# EAGLE board GPS_board_brd (EAGLE 8.6.0)
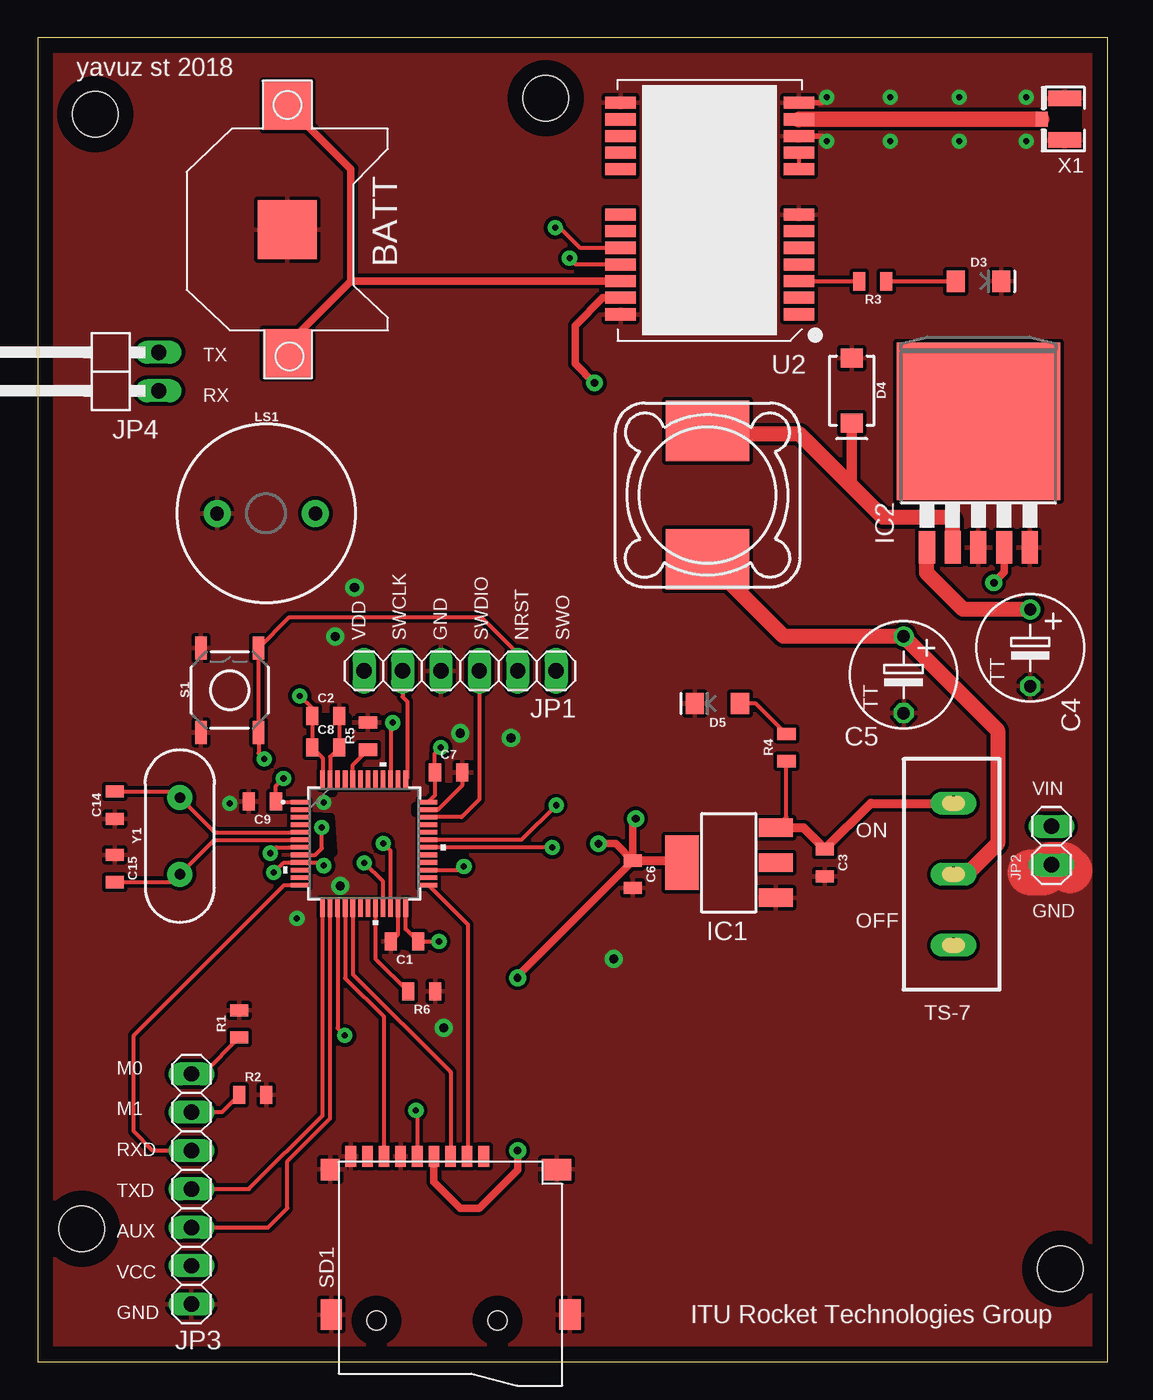
[diagram p0: board, top side]
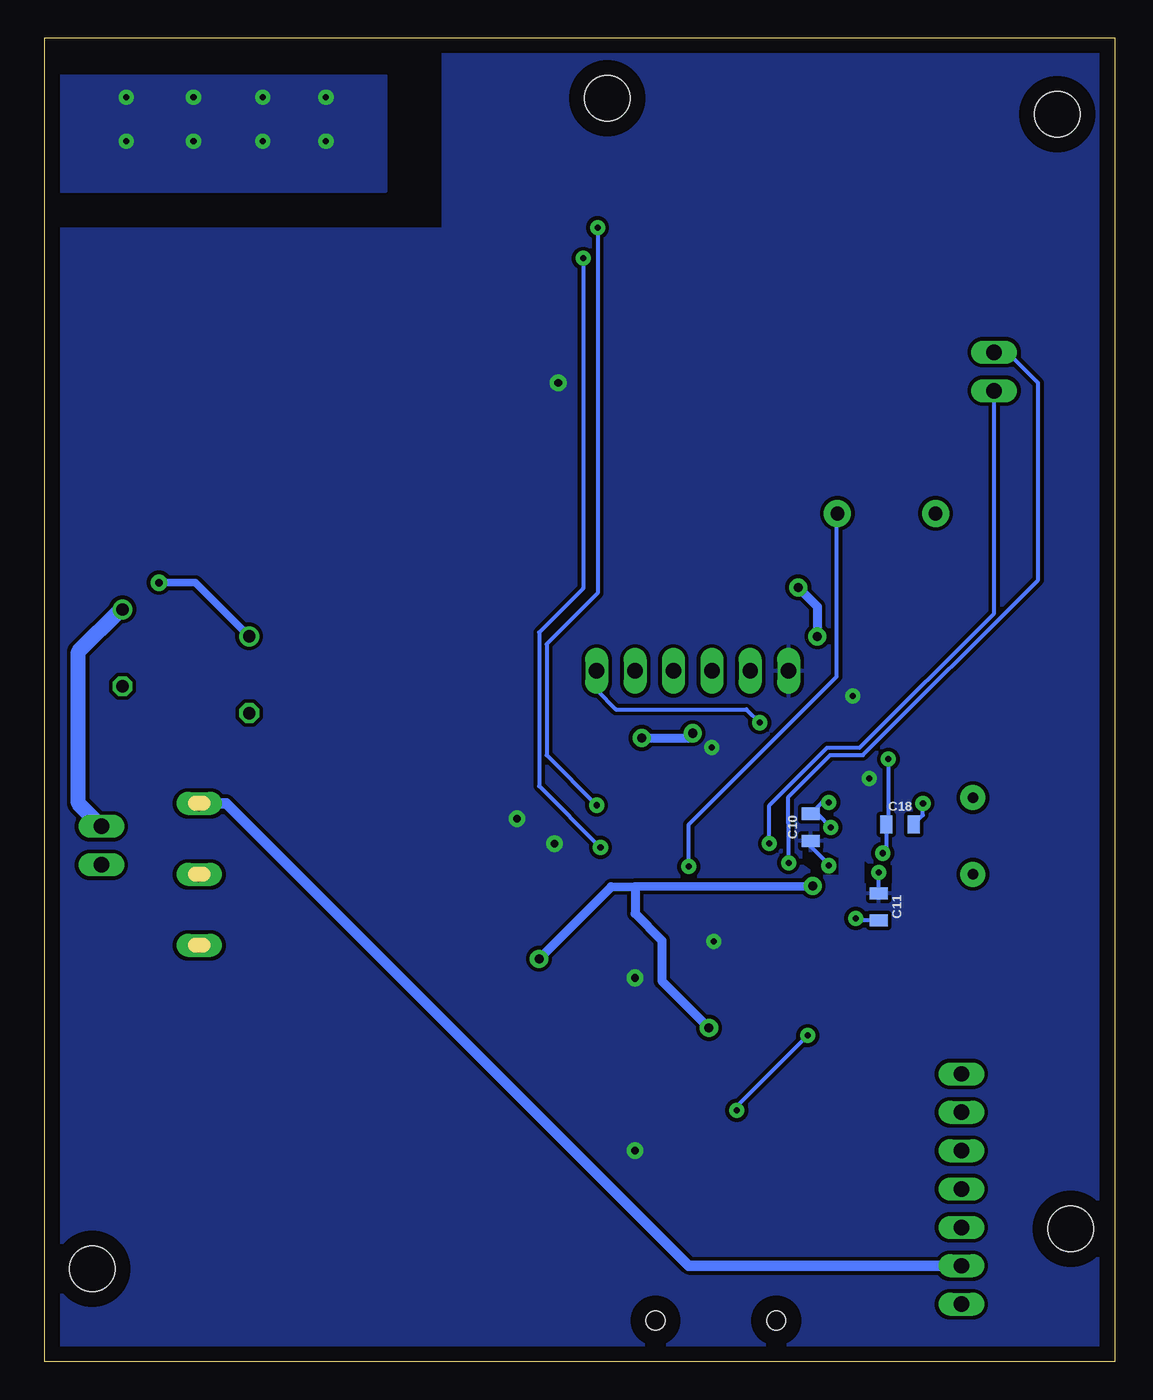
[diagram p1: board, bottom side, seen from below]

Size 70.79 x 87.62 mm. Coordinates in mm from the lower left corner, seen from the top.
Outline: 0,0 70.79,0 70.79,87.62 0,87.62 0,0
Copper layers (1*16): Top 0.035mm / dielectric 1mm / Bottom 0.035mm
Design rules "default *": minimum track width 0.25mm, minimum drill 0.4mm, track to track 0.25mm, track to pad 6mil, pad to pad 6mil, via to via 6mil, smd to smd 6mil, copper to edge 40mil, drill to drill 6mil, minimum pad ring 10mil, minimum via ring 0.3mm, stop-mask expansion 4mil, vias tented up to drill 0mil, thermal gap 0.25mm
Holes 3 mm at 3.81,82.55 2.91,8.81 67.65,6.16 33.6,83.62
tRestrict: area 25,36.3 to 25.2,36.8; area 26.6,36.4 to 29,38; area 19.1,37.7 to 19.6,37.9; area 19.7,39.4 to 20.5,39.9; area 18.4,40.2 to 20.5,42.7; area 18.2,33.5 to 19.6,36.1; area 22.8,28.6 to 23.6,29.3; area 23.4,27.5 to 24.4,28
bRestrict: area 18.4,32.3 to 20.6,33.7; area 14.8,31.7 to 16.5,33.1

## Footprints (pad centres in the part's own frame; a part is rotated, then mirrored left to right if it is on the bottom)
CR1220-SMD = smd 3.2 x 3.2: +$1 -8.2,0; +$2 8.2,0 | smd 3.9 x 3.9: - 0,0
0805 = smd 0.8 x 1.2: 1 -0.9,0; 2 0.9,0
TT5D7 = drill 0.813: + -2.54,0 | drill 0.813 octagon: - 2.54,0
LED-1206 = smd 1.2 x 1.4: A -1.5,0; C 1.5,0
SMA-DIODE = smd 1.27 x 1.47: A -2.15,0; C 2.15,0
SOT223 = smd 1.219 x 2.235: 1 -2.311,-3.099; 2 0,-3.099; 3 2.311,-3.099 | smd 3.6 x 2.2: TAB 0,3.099
TO263-5 = smd 1.067 x 2.159: 1 -3.404,-5.791; 2 -1.702,-5.791; 3 0,-5.791; 4 1.702,-5.791; 5 3.404,-5.791 | smd 10.8 x 10.41: 6 0,2.54
1X06 = drill 1.016 long: 1 -6.35,0; 2 -3.81,0; 3 -1.27,0; 4 1.27,0; 5 3.81,0; 6 6.35,0
1X02 = drill 1.016 long: 1 -1.27,0; 2 1.27,0
1X07 = drill 1.016 long: 1 -7.62,0; 2 -5.08,0; 3 -2.54,0; 4 0,0; 5 2.54,0; 6 5.08,0; 7 7.62,0
1X02/90 = drill 1.016 long: 1 -1.27,-3.81; 2 1.27,-3.81
BUZZER-12MM = drill 0.9 pad 1.778: + 3.25,0; - -3.25,0
TACTILE_SWITCH_SMD_5.2MM = smd 1.524 x 0.762: 1 -2.794,1.905; 2 2.794,1.905; 3 -2.794,-1.905; 4 2.794,-1.905
TF-PULL = smd 0.7 x 1.4: 1 -2.2,-7.62; 2 -1.1,-7.62; 3 0,-7.62; 4 1.1,-7.62; 5 2.2,-7.62; 6 3.3,-7.62; 7 4.4,-7.62; 8 5.5,-7.62; 9 6.6,-7.62 | smd 1.4 x 2: S1 -7.9,2.85; S2 7.9,2.85 | smd 1.28 x 1.4: S3 7.96,-6.75 | smd 1.95 x 1.4: S4 -7.025,-6.75 | hole 1.25: -3.1,3.25; 4.9,3.25
TS7 = drill 1 pad 1.5 long: 1 0,0; 2 4.7,0; 3 -4.7,0
LQFP48-7X7MM = smd 1.194 x 0.305: 1 -4.25,2.75; 2 -4.25,2.25; 3 -4.25,1.75; 4 -4.25,1.25; 5 -4.25,0.75; 6 -4.25,0.25; 7 -4.25,-0.25; 8 -4.25,-0.75; 9 -4.25,-1.25; 10 -4.25,-1.75; 11 -4.25,-2.25; 12 -4.25,-2.75; 25 4.25,-2.75; 26 4.25,-2.25; 27 4.25,-1.75; 28 4.25,-1.25; 29 4.25,-0.75; 30 4.25,-0.25; 31 4.25,0.25; 32 4.25,0.75; 33 4.25,1.25; 34 4.25,1.75; 35 4.25,2.25; 36 4.25,2.75 | smd 0.305 x 1.194: 13 -2.75,-4.25; 14 -2.25,-4.25; 15 -1.75,-4.25; 16 -1.25,-4.25; 17 -0.75,-4.25; 18 -0.25,-4.25; 19 0.25,-4.25; 20 0.75,-4.25; 21 1.25,-4.25; 22 1.75,-4.25; 23 2.25,-4.25; 24 2.75,-4.25; 37 2.75,4.25; 38 2.25,4.25; 39 1.75,4.25; 40 1.25,4.25; 41 0.75,4.25; 42 0.25,4.25; 43 -0.25,4.25; 44 -0.75,4.25; 45 -1.25,4.25; 46 -1.75,4.25; 47 -2.25,4.25; 48 -2.75,4.25
GPS24P-SMD-1.1-16X12.2MM = smd 2 x 0.8: 1 -5.904,6.888; 2 -5.904,5.788; 3 -5.904,4.688; 4 -5.904,3.588; 5 -5.904,2.488; 6 -5.904,1.388; 7 -5.904,0.288; 8 -5.904,-2.712; 9 -5.904,-3.812; 10 -5.904,-4.912; 11 -5.904,-6.012; 12 -5.904,-7.112; 13 5.896,-7.112; 14 5.896,-6.012; 15 5.896,-4.912; 16 5.896,-3.812; 17 5.896,-2.712; 18 5.896,0.288; 19 5.896,1.388; 20 5.896,2.488; 21 5.896,3.588; 22 5.896,4.688; 23 5.896,5.788; 24 5.896,6.888
MSS1260 = smd 5.5 x 4: P$1 0,4.25; P$2 0,-4.25
U.FL = smd 2.2 x 1.05: 1 0,1.375; 2 0,-1.375 | smd 0.8 x 1: 3 1.525,0
HC49US = drill 0.7 pad 1.651: 1 -2.54,0; 2 2.54,0

## Placement (x,y rotation side)
BATT  [CR1220-SMD]  16.51,74.93 270 top
C1  100nF  [0805]  24.26,27.81 180 top
C2  10uF  [0805]  19.05,42.74 0 top
C3  10uF  [0805]  52.07,33.02 270 top
C4  680uF  [TT5D7]  65.66,47.24 270 top
C5  220uF  [TT5D7]  57.28,45.47 270 top
C6  22uF  [0805]  39.37,32.26 270 top
C7  100nF  [0805]  27.18,38.99 0 top
C8  100nF  [0805]  19.05,40.64 0 top
C9  100nF  [0805]  14.86,37.08 180 top
C10  100nF  [0805]  20.13,35.37 90 bottom
C11  1uF  [0805]  15.62,30.1 270 bottom
C14  20pF  [0805]  5.08,36.83 90 top
C15  20pF  [0805]  5.08,32.64 270 top
C18  100nF  [0805]  14.22,35.56 0 bottom
D3  BLUE  [LED-1206]  62.23,71.5 0 top
D4  3A/40V/500mV  [SMA-DIODE]  53.85,64.26 270 top
D5  RED  [LED-1206]  44.96,43.56 180 top
IC1  LM1117IMPX-3.3  [SOT223]  45.72,33.02 90 top
IC2  LM2596S  [TO263-5]  62.23,59.69 0 top
JP1  [1X06]  27.94,45.72 180 top
JP2  [1X02]  67.06,34.16 270 top
JP3  [1X07]  10.16,11.43 90 top
JP4  [1X02/90]  4.19,65.53 90 top
LS1  BUZZER-PTH  [BUZZER-12MM]  15.11,56.13 0 top
R1  10k  [0805]  13.34,22.35 90 top
R2  10k  [0805]  14.22,17.65 0 top
R3  1k  [0805]  55.24,71.5 180 top
R4  560  [0805]  49.53,40.64 90 top
R5  10k  [0805]  21.84,41.4 90 top
R6  10k  [0805]  25.4,24.51 180 top
S1  [TACTILE_SWITCH_SMD_5.2MM]  12.7,44.45 90 top
SD1  TF-HOLDER  [TF-PULL]  27.3,5.97 180 top
TS-7  TS-7  [TS7]  60.58,32.26 90 top
U1  [LQFP48-7X7MM]  21.59,34.29 0 top
U2  MOUDLE-GPS-NEO-6M(24P-16X12.2MM)  [GPS24P-SMD-1.1-16X12.2MM]  44.45,76.2 180 top
U$1  33uH  [MSS1260]  44.3,57.35 180 top
X1  [U.FL]  67.94,82.23 180 top
Y1  [HC49US]  9.4,34.8 90 top

## Library data of the parts
BATT X1 = adafruit
C1-C3 C6-C11 C14 C15 C18 = SparkFun-Capacitors; PROD_ID: CAP-11330
C4 C5 = resistor
D3 = SparkFun-LED; PROD_ID: DIO-09911
D4 = SparkFun-DiscreteSemi; PROD_ID: DIO-09886
D5 = SparkFun-LED; PROD_ID: DIO-09912
IC1 = lm1117
IC2 = national-semiconductor; MF: NATIONAL SEMICONDUCTOR; MPN: LM2596S-ADJ/NOPB; OC_FARNELL: 9494367; OC_NEWARK: 41K3842
JP1-JP4 = pinhead
LS1 = SparkFun-Electromechanical; PROD_ID: COMP-08253; SF_SKU: COM-07950
R1-R6 = SparkFun-Resistors; PROD_ID: RES-11622
S1 = SparkFun-Switches; PROD_ID: SWCH-08247; SF_SKU: COM-08720
SD1 = sd-mmc
TS-7 = ts-7-switch
U1 = stm32f103cxt2; MANUFACTURER_PART_NUMBER: stm32f103cxt2; VENDOR: STMicroelectronics
U2 = MOUDLE-GPS-NEO-6M_24P-16X12.2MM_; AVAILABILITY: Unavailable; DESCRIPTION: SMD GPS Module;; MF: u-blox; MP: NEO-6M-GPS; PACKAGE: None; PRICE: None
U$1 = inductor-coilcraft
Y1 = SparkFun-Clocks

## Nets
5V: C3.1 IC1.3 JP3.2 R4.1 TS-7.2
5VS: C5.+ IC2.4 TS-7.1 U$1.P$1
CS: SD1.2 U1.25
GND: BATT.- C1.2 C2.2 C3.2 C4.- C5.- C6.2 C7.2 C8.2 C9.2 C10.2 C11.2 C14.1 C15.1 C18.2 D3.C D4.A D5.C IC1.1 IC2.3 IC2.5 JP1.4 JP2.2 JP3.1 LS1.- R1.2 R2.2 R5.2 R6.1 S1.1 S1.2 SD1.6 SD1.9 SD1.S1 SD1.S2 SD1.S3 SD1.S4 U1.8 U1.23 U1.35 U1.47 U2.7 U2.10 U2.12 U2.13 U2.24 X1.1 X1.2
MISO: SD1.7 U1.16
MOSI: SD1.3 U1.17
N$2: C14.2 U1.5 Y1.2
N$3: C15.2 U1.6 Y1.1
N$7: BATT.+$1 BATT.+$2 U2.22
N$8: U2.11 X1.3
N$11: R5.1 U1.44
N$12: R6.2 U1.20
N$13: D4.C IC2.2 U$1.P$2
N$16: D5.A R4.2
N$18: U2.8 U2.9
N$20: R3.2 U2.3
N$21: D3.A R3.1
N$22: JP3.7 R1.1
N$23: JP3.6 R2.1
NRST: C18.1 JP1.2 S1.3 S1.4 U1.7
PA2: JP3.5 U1.12
PA3: JP3.4 U1.13
PA4: JP3.3 U1.14
PA9: U1.30 U2.21
PA10: U1.31 U2.20
PA13: JP1.3 U1.34
PA14: JP1.5 U1.37
PB3: JP1.1 U1.39
PB10: JP4.2 U1.21
PB11: JP4.1 U1.22
PB14: LS1.+ U1.27
SCK: SD1.5 U1.15
VDD: C1.1 C2.1 C6.1 C7.1 C8.1 C9.1 C10.1 C11.1 IC1.TAB JP1.6 SD1.4 U1.1 U1.9 U1.24 U1.36 U1.48 U2.23
VIN: C4.+ IC2.1 JP2.1

## Tracks (layer width: path | path; a pad name or v marks a point on that pad's centre or on a via)
5V
  Top 0.25: IC1.3 49.53,36.04 R4.1
  Top 0.6: IC1.3 50.66,35.33 C3.1 55.11,36.96 TS-7.2
  Bottom 0.7: JP3.2 28.19,6.35 58.8,36.96 TS-7.2
5VS  (via drill 0.5)
  Top 0.5: v63.25,51.56 63.93,52.25 IC2.4
  Top 1: TS-7.1 61.47,32.26 63.5,34.29 63.5,41.78 C5.+ 49.34,48.01 44.3,53.05 U$1.P$1
  Bottom 0.5: v63.25,51.56 60.83,51.56 C5.+
CS
  Top 0.25: U1.25 28.45,28.93 28.45,13.63 SD1.2
GND  (via drill 0.4, 0.6)
  Top 0.25: C1.2 23.84,28.3 U1.23 | U1.47 19.34,40.03 C8.2 C2.2 | U1.35 26.48,36.54 28.08,38.14 C7.2 | U1.8 18.36,33.54 18.8,33.97 v18.8,35.37
  Top 0.35: U2.10 51.86,81.11 v52.2,80.77 | U2.12 51.82,83.31 v52.2,83.69
  Top 3: 65.66,32.38 66.55,32.38 JP2.2 67.88,32.89 68.26,32.51
  Bottom 0.25: C11.2 17.01,29.2 v17.14,29.34 | C18.2 12.7,36.18 v12.7,36.96 | v18.8,35.37 19.7,36.27 C10.2 19.38,37.02 v18.92,37.02
  Bottom 0.6: v38.1,26.67 33.34,31.43 31.75,31.44 | 31.75,31.44 v20,31.5 | 31.75,31.44 31.75,29.65 29.97,27.88 29.97,25.21 v26.86,22.1 | v31.3,41.27 28.26,41.27 v27.94,41.59 | v20.95,51.24 19.68,49.97 v19.68,48.01
  other vias: 56.39,80.77 60.96,80.77 65.41,80.77 56.39,83.69 60.96,83.69 65.41,83.69
  pour Top (isolate 0.25): 0,87.63 0,0 71.12,0 71.12,87.63
  pour Bottom: 48.26,85.09 48.26,77.47 71.12,77.47 71.12,85.09
MISO
  Top 0.25: U1.16 20.34,25.38 22.91,22.82 SD1.7
MOSI
  Top 0.25: U1.17 20.84,25.64 27.3,19.18 SD1.3
N$2
  Top 0.25: U1.5 11.7,35.04 Y1.2 9.01,37.73 C14.2
N$3
  Top 0.25: U1.6 11.68,34.54 Y1.1 8.88,31.74 C15.2
N$7
  Top 0.5: U2.22 20.71,71.51 | 16.51,66.04 BATT.+$2 16.51,67.31 20.71,71.51 | 20.71,71.51 20.71,78.93 BATT.+$1
N$8
  Top 1.035: X1.3 50.37,82.23 U2.11
N$11
  Top 0.25: U1.44 20.84,39.5 R5.1
N$12
  Top 0.25: U1.20 22.34,26.67 R6.2
N$13
  Top 0.5: 55.93,55.88 53.85,57.96
  Top 0.7: 53.85,57.96 D4.C
  Top 1: IC2.2 60.53,55.68 60.33,55.88 55.93,55.88 50.41,61.4 44.5,61.4 U$1.P$2
N$16
  Top 0.25: R4.2 47.51,43.56 D5.A
N$18
  Top 0.25: U2.9 U2.8
N$20
  Top 0.25: U2.3 50.37,71.5 R3.2
N$21
  Top 0.25: R3.1 D3.A
N$22
  Top 0.25: R1.1 10.93,19.05 JP3.7
N$23
  Top 0.25: R2.1 12.18,16.51 JP3.6
NRST  (via drill 0.4)
  Top 0.25: v15.37,33.66 15.75,34.04 U1.7 | v14.99,39.88 14.61,40.26 S1.3 S1.4 16.64,49.28 29.34,49.28 31.75,46.86 JP1.2
  Bottom 0.25: v15.37,33.66 15.12,33.9 C18.1 14.99,35.7 v14.99,39.88
PA2
  Top 0.25: JP3.5 7.62,13.97 6.35,15.24 6.35,21.59 16.3,31.54 U1.12
PA3
  Top 0.25: JP3.4 13.97,11.43 18.84,16.3 U1.13
PA4
  Top 0.25: JP3.3 15.24,8.89 16.51,10.16 16.51,13.26 19.34,16.09 U1.14
PA9  (via drill 0.4)
  Top 0.25: U2.21 35.59,72.61 v35.18,73.03 | v34.04,34.04 v34.03,34.04 U1.30
  Bottom 0.25: v35.18,73.03 35.18,51.18 38.1,48.26 38.1,38.1 v34.04,34.04
PA10  (via drill 0.4)
  Top 0.25: U2.20 35.89,73.71 34.54,75.06 v34.23,75.06 | v34.29,36.83 32,34.54 U1.31
  Bottom 0.25: v34.29,36.83 37.6,40.14 37.6,47.49 34.23,50.86 v34.23,75.06
PA13
  Top 0.25: JP1.3 29.21,37.21 28.04,36.04 U1.34
PA14
  Top 0.25: JP1.5 24.13,44.01 24.45,43.69 24.45,38.65 U1.37
PB3  (via drill 0.4)
  Top 0.25: v23.5,42.29 23.34,42.14 U1.39
  Bottom 0.25: v23.5,42.29 24.38,43.18 33.02,43.18 34.29,44.45 JP1.1
PB10  (via drill 0.4)
  Top 0.25: U1.21 22.84,31.77 v21.59,33.02
  Bottom 0.25: v21.59,33.02 21.59,35.6 21.61,35.62 21.61,37.38 18.84,40.14 16.68,40.14 5.08,51.74 5.08,64.77 7.11,66.8 JP4.2
PB11  (via drill 0.4)
  Top 0.25: U1.22 23.34,33.81 v22.86,34.29
  Bottom 0.25: v22.86,34.29 22.86,36.83 19.05,40.64 16.89,40.64 8,49.53 JP4.1
PB14  (via drill 0.4)
  Top 0.25: U1.27 27.97,32.54 v28.19,32.77
  Bottom 0.25: v28.19,32.77 28.19,35.56 18.41,45.34 18.41,56.08 LS1.+
SCK  (via drill 0.4)
  Top 0.25: U1.15 19.84,22.07 v20.32,21.59 | v25.02,16.64 25.11,16.55 SD1.5
  Bottom 0.25: v20.32,21.59 25.02,16.89 v25.02,16.64
VDD  (via drill 0.4, 0.5)
  Top 0.25: U1.24 24.34,28.63 C1.1 v26.54,27.81 | U1.48 18.84,39.95 C8.1 C2.1 18.15,43.26 v17.34,44.07 | U1.1 15.8,37.04 C9.1 15.76,38.11 v16.26,38.61 | v15.62,32.38 16.28,33.04 U1.9 18.71,33.04 v18.92,32.83 | U1.36 26.28,37.48 C7.1 26.28,40.25 v26.67,40.64
  Top 0.5: C6.1 38.24,34.29 v37.08,34.29 | SD1.4 26.2,11.89 27.94,10.16 29.21,10.16 31.75,12.7 v31.75,13.97 | C6.1 39.37,35.75 v39.56,35.94 | C6.1 31.75,25.54 v31.75,25.4 | U2.23 37.39,70.41 35.56,68.58 35.56,66.04 v36.83,64.77
  Top 0.6: IC1.TAB 42.48,33.16 C6.1
  Bottom 0.25: 18.86,32.89 18.89,32.86 | 18.89,32.86 v18.92,32.83 | C11.1 v15.62,32.38 | C10.1 20.13,34.1 18.89,32.86
  Bottom 0.5: v39.56,35.94 39.37,36.13
  pour Bottom: -1.27,88.9 44.45,88.9 44.45,74.93 72.39,74.93 72.39,-1.27 -1.27,-1.27
VIN
  Top 1: C4.+ 61.21,49.78 58.8,52.2 58.83,52.22 IC2.1
  Bottom 1: JP2.1 68.58,36.96 68.58,46.99 65.79,49.78 C4.+

## Text on the board
tNames: yavuz st 2018 | TX / / RX | VDD / / SWCLK / / GND / / SWDIO / / NRST / / SWO | ON / / / / OFF | VIN / / / / / / GND | ITU Rocket Technologies Group | M0 / / M1 / / RXD / / TXD / / AUX / / VCC / / GND